# Allegro board PiMod_MOT_R0A v0.1.brd
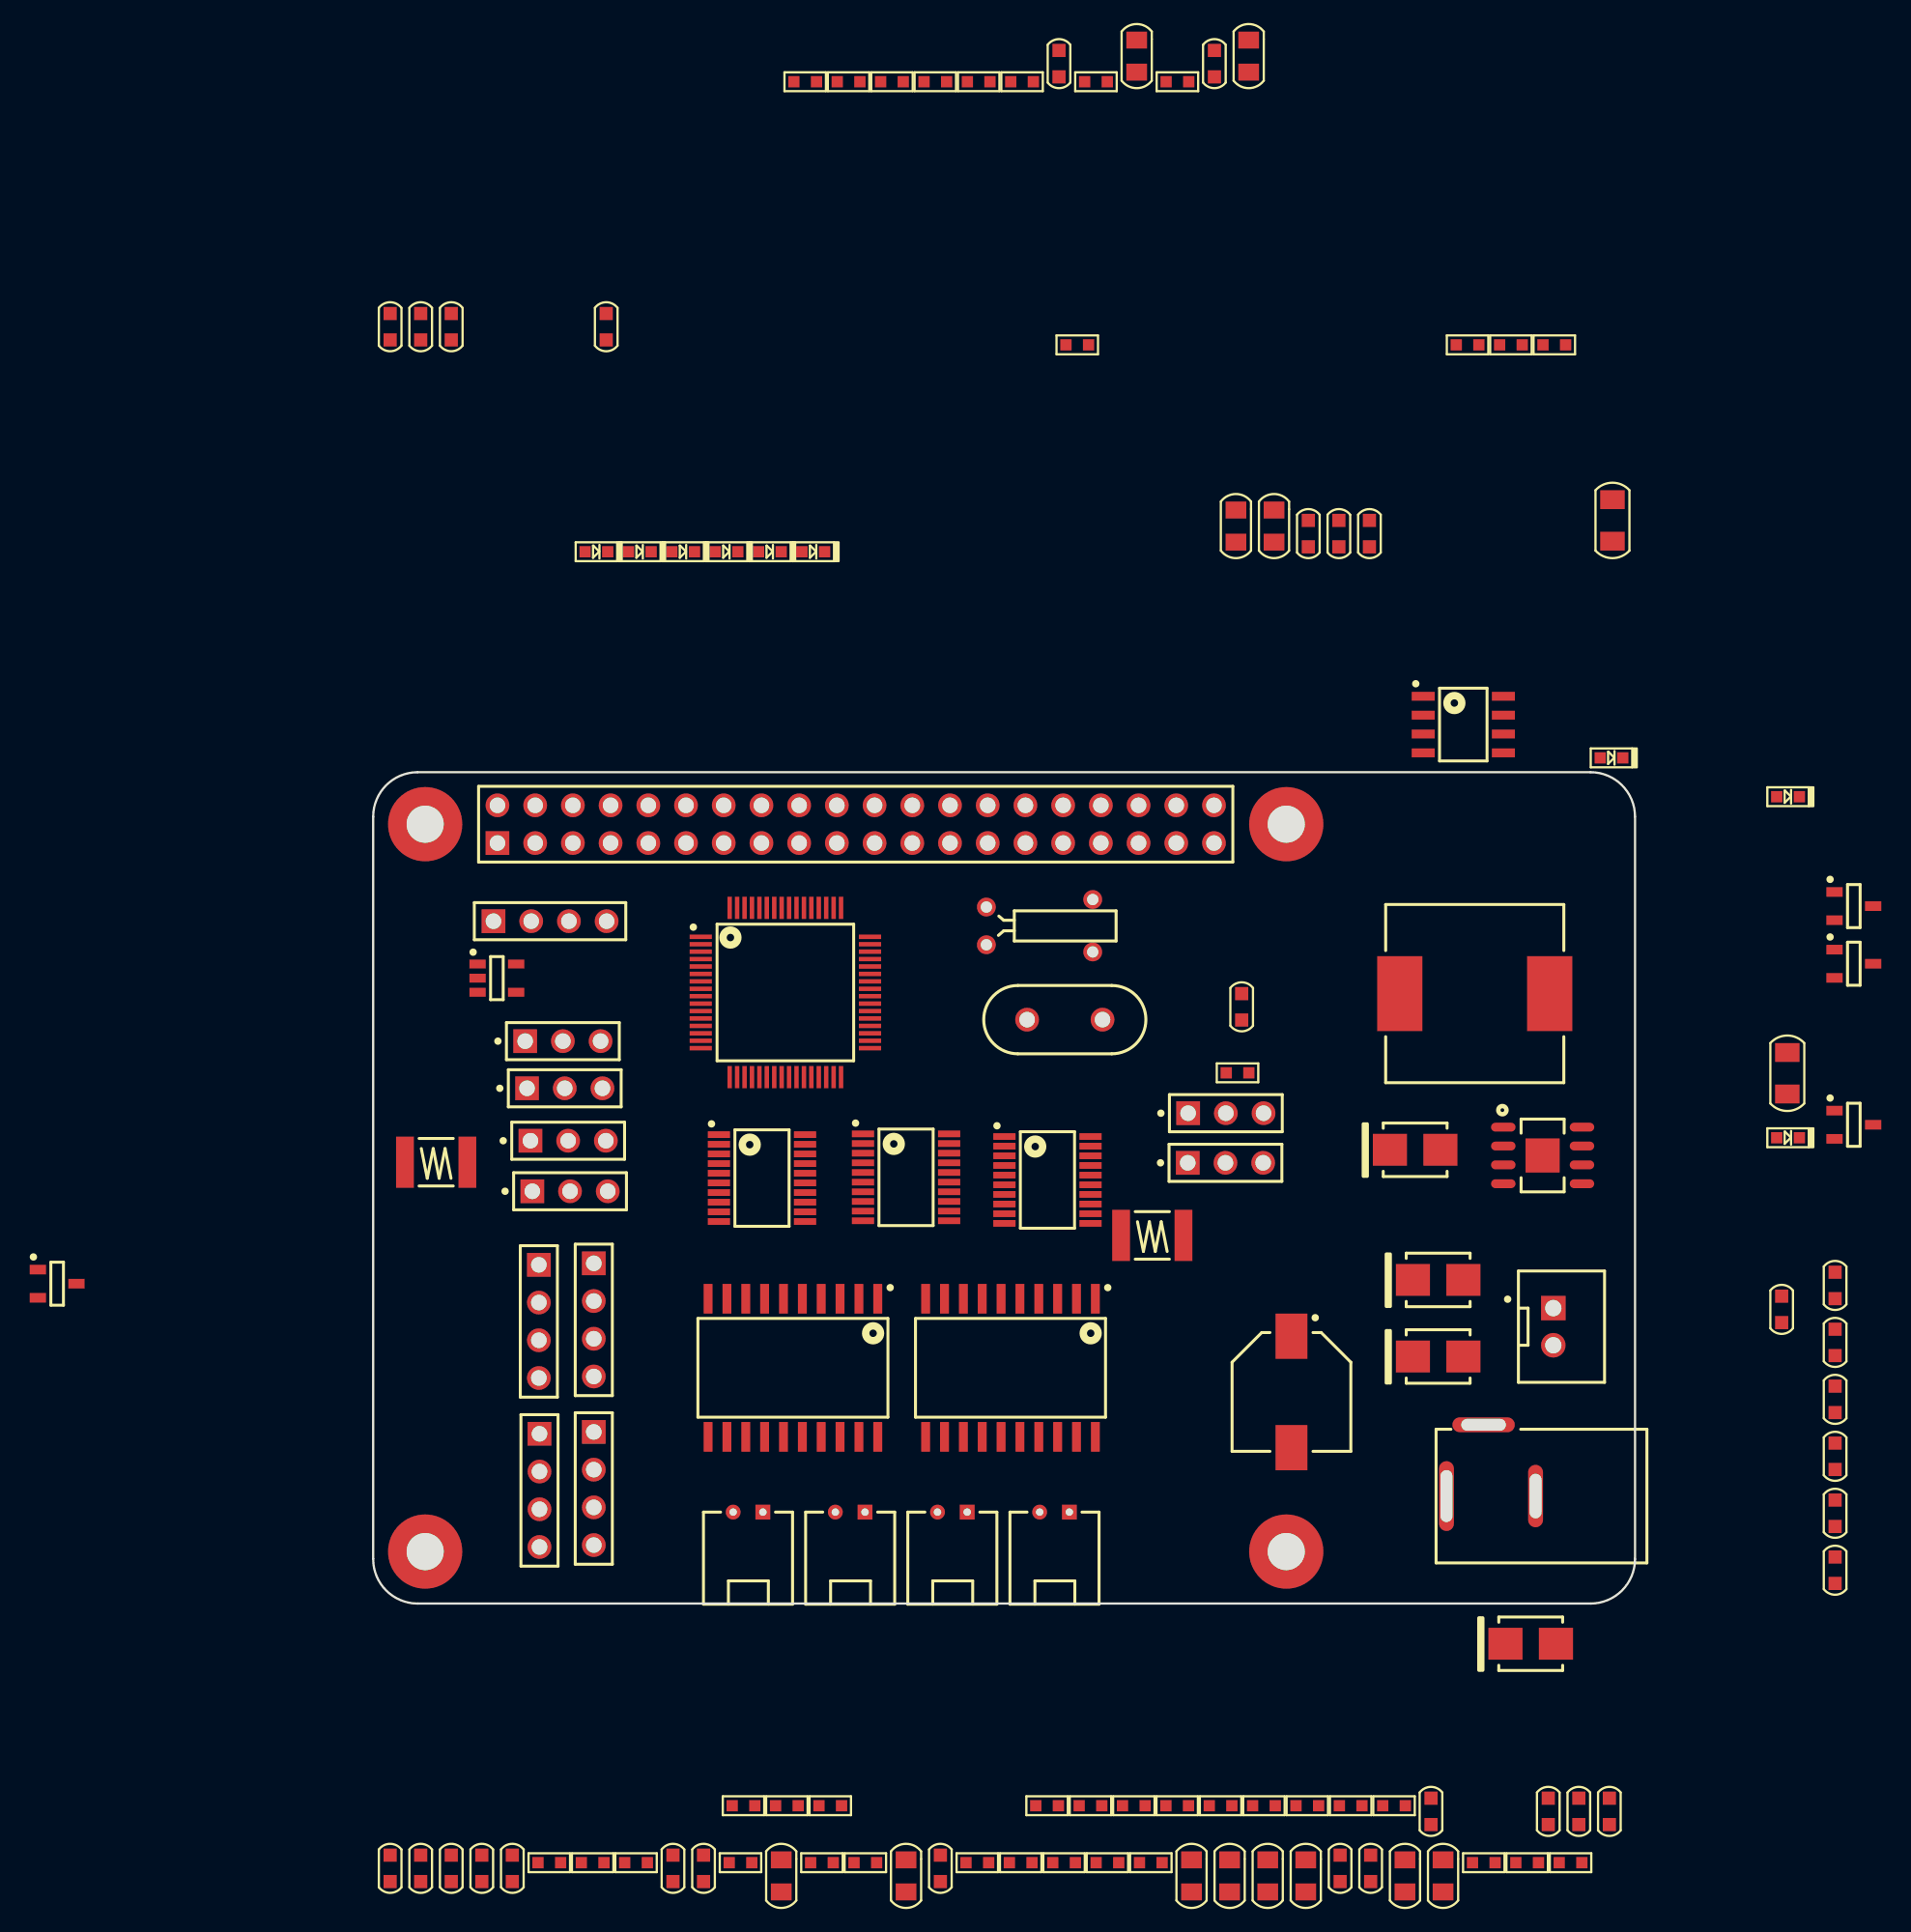
[diagram p0: board, top side]
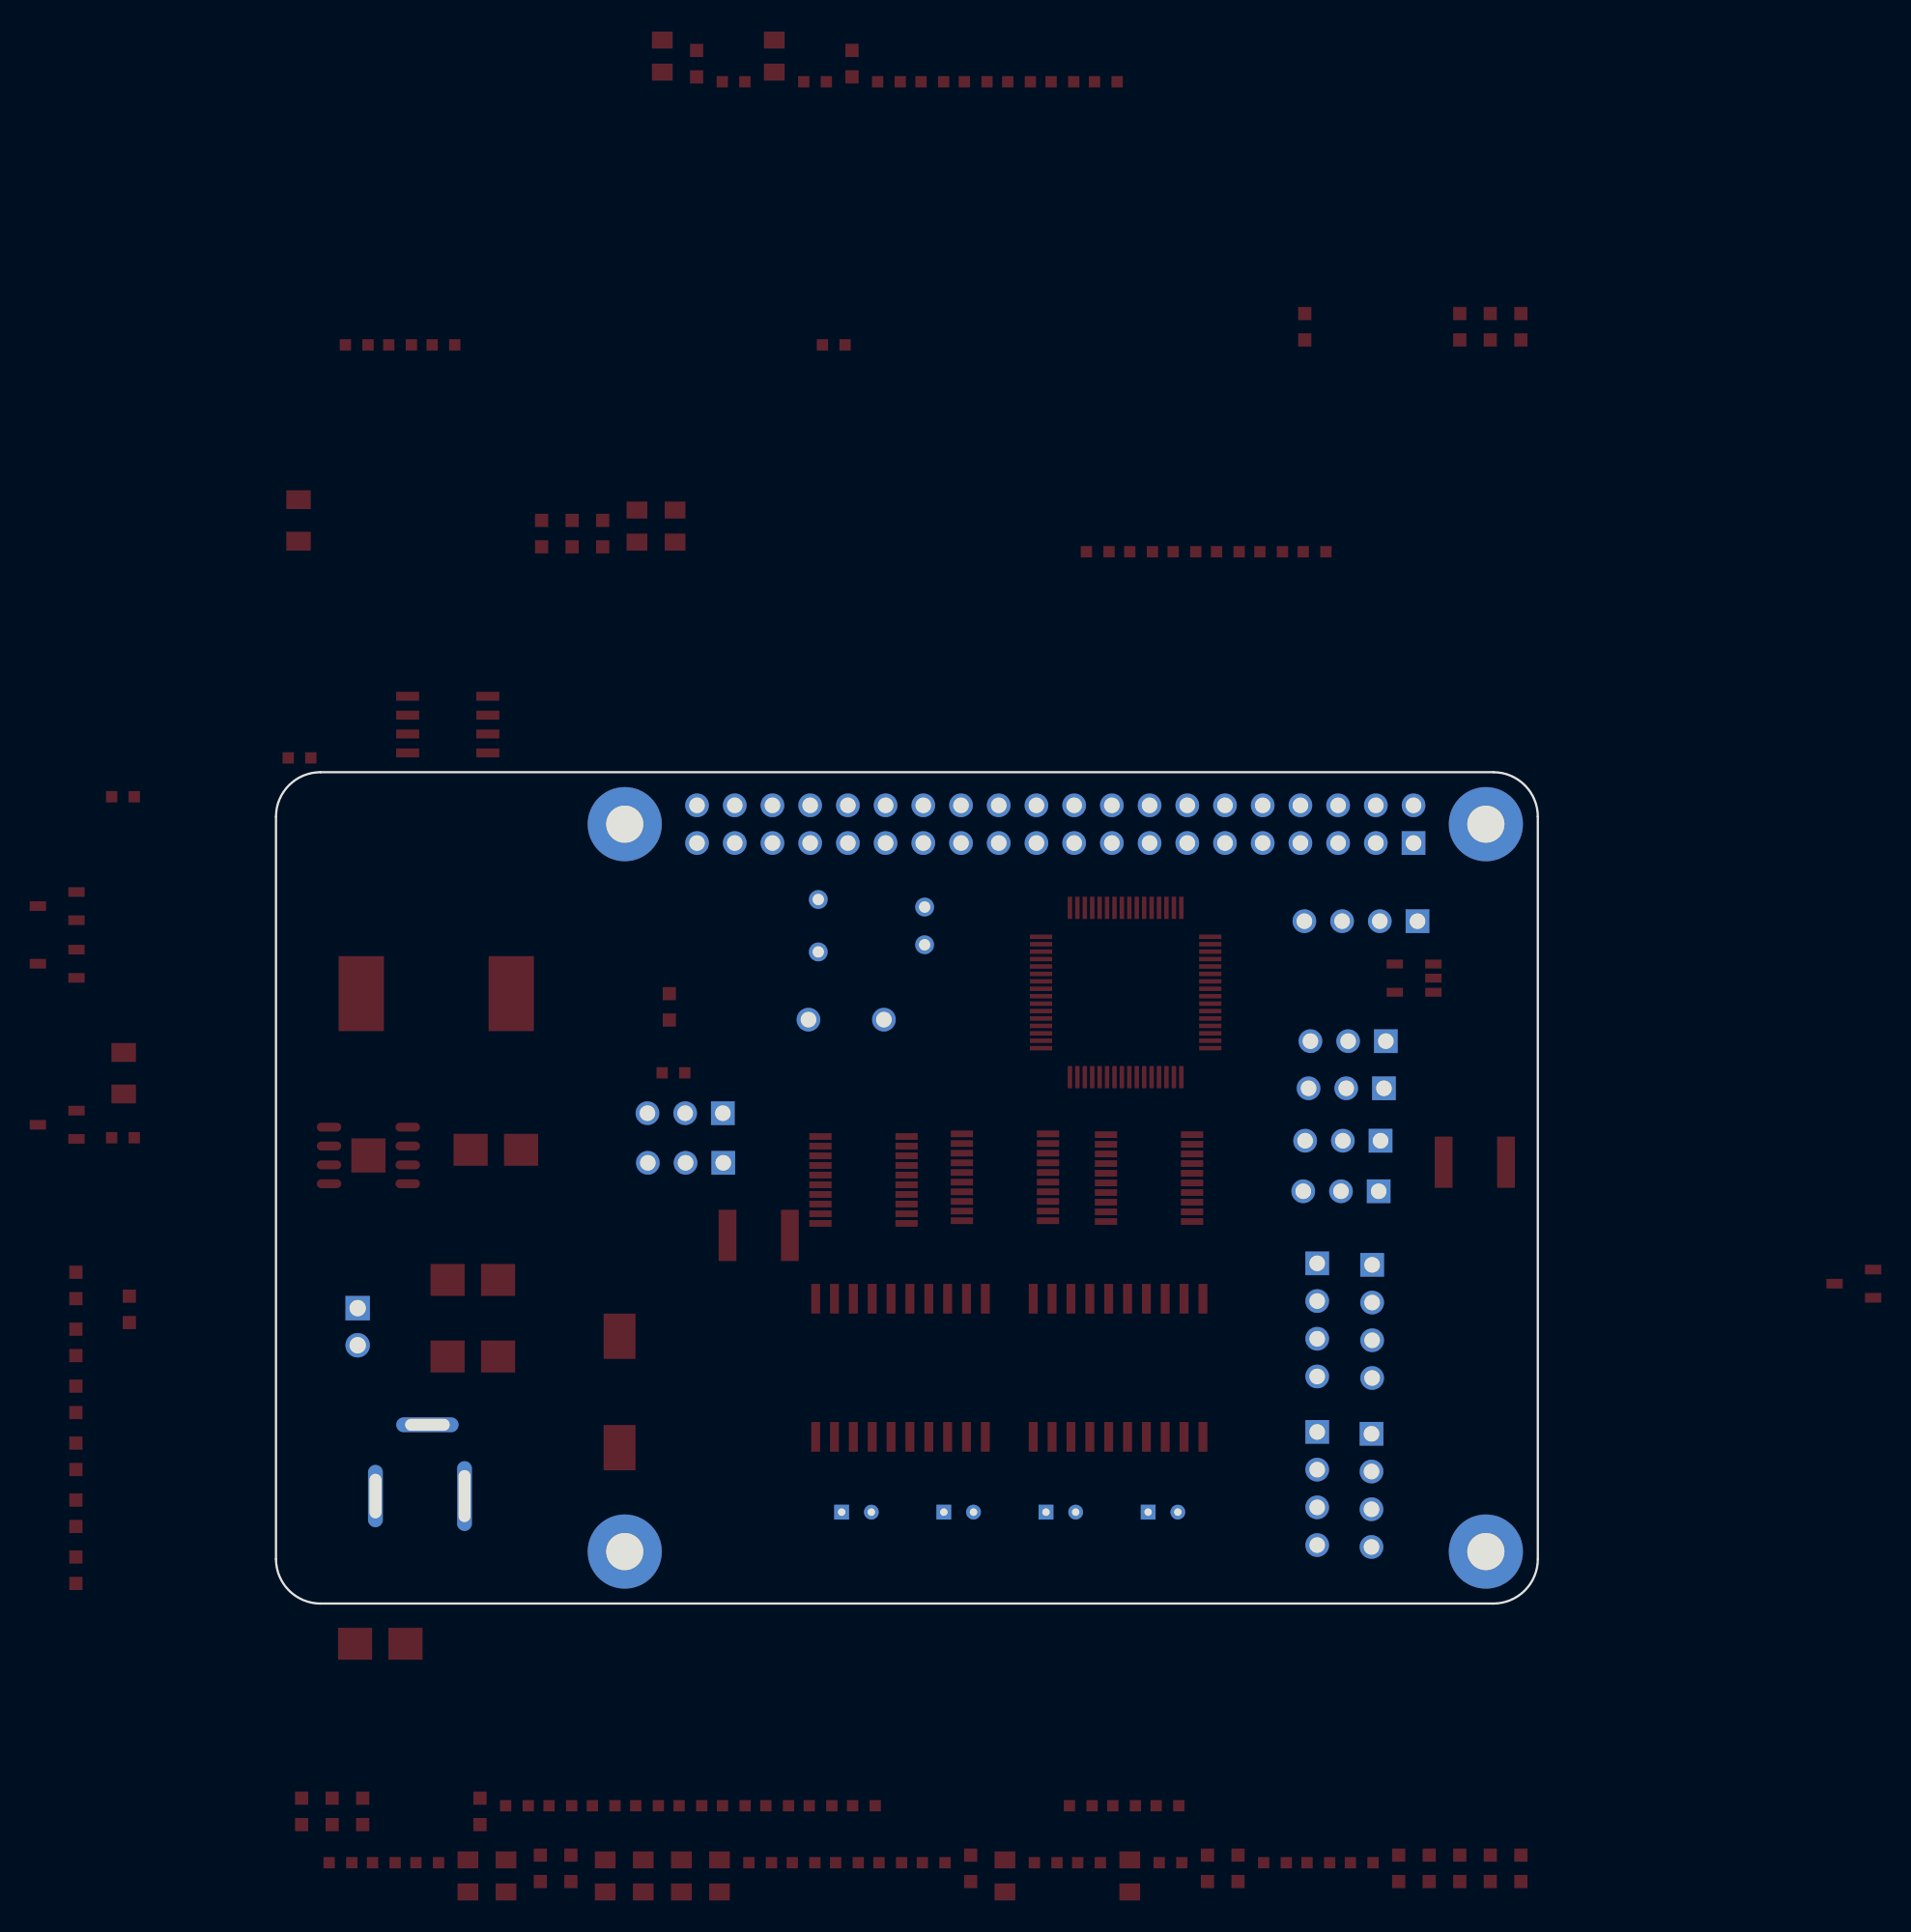
[diagram p1: board, bottom side, seen from below]

Outline 84.99 x 55.98 mm; copper layers: TOP, BOTTOM. Coordinates in mm from the lower left corner of the outline.
Outline path: 0,52.98 0,3 arc(0.88,0.88) 3,0 81.99,0 arc(84.11,0.88) 84.99,3 84.99,52.98 arc(84.11,55.1) 81.99,55.98 3,55.98 arc(0.88,55.1) 0,52.98

## Placement (name value [footprint] x y rotation side)
BT1  BATTERY  [XH2_5_2P]  79.49 19.89 270 top
C1  22pF NC  [C0603]  58.5 40.18 0 top
C2  22pF NC  [C0603]  5.26 85.98 0 top
C3  22pF  [C0603]  67.1 72.05 0 top
C4  22pF  [C0603]  65.04 72.05 0 top
C5  0.1uF  [C0603]  71.25 -14 0 top
C6  0.1uF NC  [C0603]  62.99 72.05 0 top
C7  0.1uF  [C0603]  94.86 19.81 0 top
C8  10uF  [C0805]  60.67 72.56 0 top
C9  10uF  [C0805]  58.11 72.56 0 top
C10  0.1uF  [C0603]  3.2 85.98 0 top
C11  0.1uF  [C0603]  1.14 85.98 0 top
C12  0.1uF  [C0603]  83.26 -14 0 top
C13  1.5nF  [C0603]  15.7 85.98 0 top
C14  22uF  [C1206]  95.25 35.71 0 top
C15  22uF  [C1206]  83.47 72.94 0 top
C16  0.1uF  [C0603]  81.2 -14 0 top
C17  0.1uF  [C0603]  79.15 -14 0 top
C35  330uF NC  [CAP8X8H10]  61.85 14.25 270 top
C36  10uF  [C0805]  58.97 104.2 0 top
C37  0.1uF  [C0603]  22.25 -17.83 0 top
C38  0.1uF  [C0603]  1.14 -17.83 0 top
C39  0.1uF  [C0603]  7.32 -17.83 0 top
C40  0.1uF  [C0603]  56.66 103.69 0 top
C41  0.1uF  [C0603]  46.19 103.69 0 top
C55  10uF  [C0805]  51.42 104.2 0 top
C56  0.1uF  [C0603]  38.2 -17.83 0 top
C57  0.1uF  [C0603]  20.19 -17.83 0 top
C58  0.1uF  [C0603]  5.26 -17.83 0 top
C59  0.1uF  [C0603]  3.2 -17.83 0 top
C60  10uF  [C0805]  62.81 -18.34 0 top
C61  10uF  [C0805]  60.25 -18.34 0 top
C62  0.1uF  [C0603]  98.46 6.08 0 top
C63  0.1uF  [C0603]  98.46 21.42 0 top
C64  0.1uF  [C0603]  98.46 17.59 0 top
C65  0.1uF  [C0603]  98.46 13.75 0 top
C66  10uF  [C0805]  57.68 -18.34 0 top
C67  10uF  [C0805]  69.49 -18.34 0 top
C68  0.1uF  [C0603]  65.13 -17.83 0 top
C69  10uF  [C0805]  72.06 -18.34 0 top
C70  0.1uF  [C0603]  67.18 -17.83 0 top
C71  10uF  [C0805]  55.12 -18.34 0 top
C74  0.1uF  [C0603]  98.46 2.24 0 top
C75  0.1uF  [C0603]  98.46 9.92 0 top
C76  0.1uF  [C0603]  9.37 -17.83 0 top
C77  10uF  [C0805]  27.48 -18.34 0 top
C78  10uF  [C0805]  35.89 -18.34 0 top
D1  BAT54S  [SOT23]  -21.29 21.54 0 top
D5  SS54  [DO214AA_SMB]  77.96 -2.71 0 top
D6  SS54  [DO214AA_SMB]  71.73 16.64 0 top
D7  SMBJ18CA  [DO214AA_SMB]  70.18 30.56 0 top
D8  SS54  [DO214AA_SMB]  71.73 21.79 0 top
D9  BAT54S  [SOT23]  99.73 43.08 0 top
D10  BAT54S  [SOT23]  99.73 46.97 0 top
D11  BAT54S  [SOT23]  99.73 32.24 0 top
F1  8V 2.6A  [FUSE1812]  4.24 29.72 0 top
F2  8V 2.6A  [FUSE1812]  52.48 24.79 0 top
J1  RPI CON  [SIP20X2]  8.37 51.21 0 top
J7  SWD_CON  [SIP4]  8.1 45.95 0 top
J8  MOTOR_CON  [PH2_2P_90D]  40.01 6.16 180 top
J9  MOTOR_CON  [PH2_2P_90D]  46.89 6.16 180 top
J10  MOTOR_CON  [PH2_2P_90D]  26.25 6.16 180 top
J11  MOTOR_CON  [PH2_2P_90D]  33.13 6.16 180 top
J12  SPEED_MON  [SIP4]  14.86 11.56 270 top
J13  SPEED_MON  [SIP4]  11.16 22.81 270 top
J14  ULTRA_SOUND  [SIP4]  14.86 22.91 270 top
J15  ULTRA_SOUND  [SIP4]  11.2 11.43 270 top
J16  MCU_USART2  [SIP3]  54.89 33.02 0 top
J17  MCU_USART1  [SIP3]  54.86 29.68 0 top
L1  6.8uH  [CD127]  74.19 41.07 0 top
LD1  BLUE  [LED0603]  94.53 54.33 0 top
LD2  BLUE  [LED0603]  82.64 56.95 0 top
LD3  BLUE  [LED0603]  94.53 31.37 0 top
LD4  BLUE  [LED0603]  14.27 70.83 0 top
LD5  RED  [LED0603]  17.2 70.83 0 top
LD6  RED  [LED0603]  20.12 70.83 0 top
LD7  RED  [LED0603]  23.04 70.83 0 top
LD8  RED  [LED0603]  25.96 70.83 0 top
LD9  RED  [LED0603]  28.88 70.83 0 top
P1  DC_JACK_5  [DC005]  78.29 7.24 180 top
R1  4.7K  [R0603]  57.45 35.74 0 top
R2  4.7K  [R0603]  46.66 84.76 0 top
R3  10K NC  [R0603]  27.1 -13.61 0 top
R4  10K NC  [R0603]  30.02 -13.61 0 top
R5  1K  [R0603]  47.55 -13.61 0 top
R6  1K  [R0603]  50.47 -13.61 0 top
R7  1K  [R0603]  53.39 -13.61 0 top
R8  1K  [R0603]  56.31 -13.61 0 top
R49  100K NC  [R0603]  44.63 -13.61 0 top
R50  52.3K 1%  [R0603]  59.23 -13.61 0 top
R51  30K  [R0603]  62.15 -13.61 0 top
R52  10K 1%  [R0603]  65.07 -13.61 0 top
R53  10K  [R0603]  68 -13.61 0 top
R54  4.7K  [R0603]  72.95 84.76 0 top
R55  1K  [R0603]  24.18 -13.61 0 top
R56  4.7K  [R0603]  75.87 84.76 0 top
R57  4.7K  [R0603]  78.79 84.76 0 top
R58  0R  [R0603]  11.1 -17.45 0 top
R59  0R  [R0603]  14.02 -17.45 0 top
R76  100R  [R0603]  42.85 -17.45 0 top
R77  100R  [R0603]  45.77 -17.45 0 top
R78  0R  [R0603]  16.94 -17.45 0 top
R79  0R  [R0603]  39.93 -17.45 0 top
R80  0R  [R0603]  74.04 -17.45 0 top
R81  0R  [R0603]  23.98 -17.45 0 top
R82  0R  [R0603]  53.41 102.48 0 top
R83  0R  [R0603]  29.46 -17.45 0 top
R84  10K  [R0603]  28.34 102.48 0 top
R85  90.9K  [R0603]  48.69 -17.45 0 top
R86  10K  [R0603]  31.26 102.48 0 top
R87  10K  [R0603]  34.18 102.48 0 top
R88  10K  [R0603]  37.1 102.48 0 top
R89  10K  [R0603]  40.02 102.48 0 top
R90  10K  [R0603]  42.94 102.48 0 top
R91  90.9K  [R0603]  51.61 -17.45 0 top
R92  0R  [R0603]  32.38 -17.45 0 top
R93  0R  [R0603]  79.88 -17.45 0 top
R94  0R  [R0603]  76.96 -17.45 0 top
R95  0R  [R0603]  47.92 102.48 0 top
TH1  -  [TH2_5]  3.5 3.5 0 top
TH2  -  [TH2_5]  61.5 3.5 0 top
TH3  -  [TH2_5]  3.5 52.48 0 top
TH4  -  [TH2_5]  61.5 52.48 0 top
U1  STM32F030R8  [LQFP64]  27.76 41.15 0 top
U2  AT24C02 NC  [SO8]  73.42 59.19 0 top
U12  RT8251GSP  [SO8_EP]  78.77 30.18 0 top
U13  L293DD  [SO20]  28.27 15.88 270 top
U14  L293DD  [SO20]  42.93 15.88 270 top
U15  SERVO_MOT_180D  [SIP3]  10.24 37.87 0 top
U16  SERVO_MOT_360D  [SIP3]  10.36 34.7 0 top
U17  SERVO_MOT_180D  [SIP3]  10.59 31.17 0 top
U18  SERVO_MOT_360D  [SIP3]  10.72 27.76 0 top
U19  SPX3819M5L  [SOT23-5]  8.33 42.11 0 top
U20  SN74LVC244APWR  [TSSOP20]  45.42 28.52 0 top
U21  SN74LVC244APWR  [TSSOP20]  35.89 28.7 0 top
U22  SN74LVC244APWR  [TSSOP20]  26.19 28.65 0 top
Y1  32.768KHz NC  [XTAL_32KHZ]  41.3 46.9 270 top
Y2  8MHz  [CYST]  44.04 39.32 0 top

## Library data of the parts
BT1 = BATTERY
C1-C4 C6 C36-C41 C55-C66 C71 C74-C78 = CAP NP
C5 C7-C17 C67-C70 = CAP_CE_0603
C35 = CAP
D1 D9-D11 = BAT54S
D5-D8 = DIODE
F1 F2 = FUSE
J1 = HEADER 20X2
J7 = CON_SWD
J8-J11 = CON2
J12-J15 = HEADER 4
J16 J17 = HEADER 3
L1 = INDUCTOR
LD1-LD9 = LED
P1 = DC_JACK
R1-R8 R49-R59 R76-R95 = R
TH1-TH4 = THROUGH_HOLE
U1 = STM32F030R8
U2 = AT24C512
U12 = RT8251GSP
U13 U14 = L293DD
U15-U18 = SERVO_MOT
U19 = SPX3819M5L
U20-U22 = SN74LVC244APWR
Y1 Y2 = ZTA

## Footprints (pads in the part's own frame, mm; a bottom-side part is the same pattern mirrored in y, then rotated)
C0603
  rect 0.889x0.889 smd: 1(0,0.889) 2(0,-0.889)
C0805
  rect 1.397x1.143 smd: 1(0,1.079) 2(0,-1.079)
C1206
  rect 1.651x1.27 smd: 1(0,1.397) 2(0,-1.397)
CAP8X8H10
  rect 3.05x2.15 smd: 1(-3.75,0) 2(3.75,0)
CD127
  rect 3.05x5.05 smd: 1(-5.05,0) 2(5.05,0)
CYST
  round 1.6 hole 1.05: 1(0,0) 2(5.08,0)
DC005
  oval 1x4.7 hole 0.8x3.5: 1(6,0)
  oval 1x4.2 hole 0.8x3: 2(0,0)
  oval 4.2x1 hole 3x0.8: 3(3.5,-4.8)
DO214AA_SMB
  rect 2.3x2.15 smd: 1(1.7,0) 2(-1.7,0)
FUSE1812
  rect 1.2x3.45 smd: 1(-2.1,0) 2(2.1,0)
LED0603
  rect 0.762x0.762 smd: 1(0,0) 2(1.524,0)
LQFP64
  rect 1.5x0.3 smd: 1(-5.7,3.75) 2(-5.7,3.25) 3(-5.7,2.75) 4(-5.7,2.25) 5(-5.7,1.75) 6(-5.7,1.25) 7(-5.7,0.75) 8(-5.7,0.25) 9(-5.7,-0.25) 10(-5.7,-0.75) 11(-5.7,-1.25) 12(-5.7,-1.75) 13(-5.7,-2.25) 14(-5.7,-2.75) 15(-5.7,-3.25) 16(-5.7,-3.75) 33(5.7,-3.75) 34(5.7,-3.25) 35(5.7,-2.75) 36(5.7,-2.25) 37(5.7,-1.75) 38(5.7,-1.25) 39(5.7,-0.75) 40(5.7,-0.25) 41(5.7,0.25) 42(5.7,0.75) 43(5.7,1.25) 44(5.7,1.75) 45(5.7,2.25) 46(5.7,2.75) 47(5.7,3.25) 48(5.7,3.75)
  rect 0.3x1.5 smd: 17(-3.75,-5.7) 18(-3.25,-5.7) 19(-2.75,-5.7) 20(-2.25,-5.7) 21(-1.75,-5.7) 22(-1.25,-5.7) 23(-0.75,-5.7) 24(-0.25,-5.7) 25(0.25,-5.7) 26(0.75,-5.7) 27(1.25,-5.7) 28(1.75,-5.7) 29(2.25,-5.7) 30(2.75,-5.7) 31(3.25,-5.7) 32(3.75,-5.7) 49(3.75,5.7) 50(3.25,5.7) 51(2.75,5.7) 52(2.25,5.7) 53(1.75,5.7) 54(1.25,5.7) 55(0.75,5.7) 56(0.25,5.7) 57(-0.25,5.7) 58(-0.75,5.7) 59(-1.25,5.7) 60(-1.75,5.7) 61(-2.25,5.7) 62(-2.75,5.7) 63(-3.25,5.7) 64(-3.75,5.7)
PH2_2P_90D
  rect 1x1 hole 0.5: 1(0,0)
  round 1 hole 0.5: 2(2,0)
R0603
  rect 0.762x0.762 smd: 1(0,0) 2(1.524,0)
SIP3
  rect 1.6x1.6 hole 1.05: 1(0,0)
  round 1.6 hole 1.05: 2(2.54,0) 3(5.08,0)
SIP4
  rect 1.6x1.6 hole 1.05: 1(0,0)
  round 1.6 hole 1.05: 2(2.54,0) 3(5.08,0) 4(7.62,0)
SIP20X2
  rect 1.6x1.6 hole 1.05: 1(0,0)
  round 1.6 hole 1.05: 2(0,2.54) 3(2.54,0) 4(2.54,2.54) 5(5.08,0) 6(5.08,2.54) 7(7.62,0) 8(7.62,2.54) 9(10.16,0) 10(10.16,2.54) 11(12.7,0) 12(12.7,2.54) 13(15.24,0) 14(15.24,2.54) 15(17.78,0) 16(17.78,2.54) 17(20.32,0) 18(20.32,2.54) 19(22.86,0) 20(22.86,2.54) 21(25.4,0) 22(25.4,2.54) 23(27.94,0) 24(27.94,2.54) 25(30.48,0) 26(30.48,2.54) 27(33.02,0) 28(33.02,2.54) 29(35.56,0) 30(35.56,2.54) 31(38.1,0) 32(38.1,2.54) 33(40.64,0) 34(40.64,2.54) 35(43.18,0) 36(43.18,2.54) 37(45.72,0) 38(45.72,2.54) 39(48.26,0) 40(48.26,2.54)
SO8
  rect 1.55x0.6 smd: 1(-2.7,1.905) 2(-2.7,0.635) 3(-2.7,-0.635) 4(-2.7,-1.905) 5(2.7,-1.905) 6(2.7,-0.635) 7(2.7,0.635) 8(2.7,1.905)
SO8_EP
  oval 1.65x0.6 smd: 1(-2.65,1.905) 2(-2.65,0.635) 3(-2.65,-0.635) 4(-2.65,-1.905) 5(2.65,-1.905) 6(2.65,-0.635) 7(2.65,0.635) 8(2.65,1.905)
  rect 2.3x2.3 smd: 9(0,0)
SO20
  rect 2x0.6 smd: 1(-4.65,5.715) 2(-4.65,4.445) 3(-4.65,3.175) 4(-4.65,1.905) 5(-4.65,0.635) 6(-4.65,-0.635) 7(-4.65,-1.905) 8(-4.65,-3.175) 9(-4.65,-4.445) 10(-4.65,-5.715) 11(4.65,-5.715) 12(4.65,-4.445) 13(4.65,-3.175) 14(4.65,-1.905) 15(4.65,-0.635) 16(4.65,0.635) 17(4.65,1.905) 18(4.65,3.175) 19(4.65,4.445) 20(4.65,5.715)
SOT23
  rect 1.1x0.65 smd: 1(-1.3,0.95) 2(-1.3,-0.95) 3(1.3,0)
SOT23-5
  rect 1.1x0.6 smd: 1(-1.3,0.95) 2(-1.3,0) 3(-1.3,-0.95) 4(1.3,-0.95) 5(1.3,0.95)
TH2_5
  round 5 hole 2.5: 1(0,0)
TSSOP20
  rect 1.5x0.45 smd: 1(-2.9,2.925) 2(-2.9,2.275) 3(-2.9,1.625) 4(-2.9,0.975) 5(-2.9,0.325) 6(-2.9,-0.325) 7(-2.9,-0.975) 8(-2.9,-1.625) 9(-2.9,-2.275) 10(-2.9,-2.925) 11(2.9,-2.925) 12(2.9,-2.275) 13(2.9,-1.625) 14(2.9,-0.975) 15(2.9,-0.325) 16(2.9,0.325) 17(2.9,0.975) 18(2.9,1.625) 19(2.9,2.275) 20(2.9,2.925)
XH2_5_2P
  rect 1.65x1.65 hole 1.1: 1(0,0)
  round 1.65 hole 1.1: 2(2.5,0)
XTAL_32KHZ
  round 1.27 hole 0.762: (-0.508,7.163) (3.023,7.163) 1(0,0) 2(2.54,0)

## Nets
GND: BT1.2(-) C1.2 C2.2 C3.2 C4.2 C5.2 C6.2 C8.2 C9.2 C10.2 C11.2 C12.1 C14.2 C15.2 C16.2 C17.2 C35.2 C36.2 C37.2 C38.2 C39.2 C40.2 C41.2 C55.2 C56.2 C57.2 C58.2 C59.2 C60.2 C61.2 C62.2 C63.2 C64.2 C65.2 C66.2 C67.2 C68.2 C69.2 C70.2 C71.2 C74.2 C75.2 C76.2 C77.2 C78.2 D1.1 D5.1(A) D7.1(A) D9.1 D10.1 D11.1 J1.6 J1.9 J1.14 J1.20 J1.25 J1.30 J1.34 J1.39 J7.4(GND) J12.4 J13.4 J14.4 J15.4 J16.3 J17.3 LD5.2(CATHODE) LD6.2(CATHODE) LD7.2(CATHODE) LD8.2(CATHODE) LD9.2(CATHODE) P1.2(GND1) P1.3(GND2) R2.2 R4.2 R51.1 R52.1 R85.1 R87.1 R89.1 R91.1 U1.12(VSSA) U1.31(VSS#31) U1.63(VSS#63) U2.1(A0) U2.2(A1) U2.4(GND) U12.4(GND1) U12.9(GND2) U13.4(GND#4) U13.5(GND#5) U13.6(GND#6) U13.7(GND#7) U13.14(GND#14) U13.15(GND#15) U13.16(GND#16) U13.17(GND#17) U14.4(GND#4) U14.5(GND#5) U14.6(GND#6) U14.7(GND#7) U14.14(GND#14) U14.15(GND#15) U14.16(GND#16) U14.17(GND#17) U15.3(GND) U16.3(GND) U17.3(GND) U18.3(GND) U19.2(GND) U20.1(1\O\E\) U20.10(GND) U20.19(2\O\E\) U21.1(1\O\E\) U21.10(GND) U21.19(2\O\E\) U22.1(1\O\E\) U22.10(GND) U22.19(2\O\E\)
VBAT: BT1.1(+) D8.1(A) R90.2
VDD3V3: C6.1 C36.1 C37.1 C38.1 C39.1 C40.1 C41.1 C68.1 C69.1 C71.1 C74.1 C75.1 C76.1 C77.1 C78.1 D1.2 D9.2 D10.2 D11.2 J7.1(VCC) R1.1 R3.1 R5.2 R6.2 R7.2 R8.2 R55.2 R88.2 U1.1(VBAT/VLCD) U1.13(VDDA) U1.32(VDD#32) U1.64(VDD#64) U2.8(VCC) U19.5(VO) U20.20(VCC) U21.20(VCC) U22.20(VCC)
VDD5V: C14.1 C15.1 C16.1 C17.1 C67.1 F1.1 F2.1 J1.2 J1.4 J12.3 J13.3 J14.1 J15.1 L1.2 R50.2 R54.2 R86.2 U19.1(VIN) U19.3(EN)
VDD12V: C8.1 C9.1 C10.1 C11.1 C35.1 D6.2(K) D7.2(K) D8.2(K) R49.1 R53.2 R84.2 U12.2(VIN)
BOOT0: R1.2 R2.1 U1.60(BOOT0)
FB_5V: R50.1 R52.2 U12.5(FB)
GPIO2: J1.3 R79.1
GPIO3: J1.5 R78.1
GPIO4: J1.7
GPIO5: J1.29
GPIO6: J1.31
GPIO7: J1.26
GPIO8: J1.24
GPIO9: J1.21 R80.1 R82.1
GPIO10: J1.19 R83.1
GPIO11: J1.23 R81.1
GPIO12: J1.32
GPIO13: J1.33
GPIO14: J1.8 R59.1
GPIO15: J1.10 R58.1
GPIO16: J1.36
GPIO17: J1.11
GPIO18: J1.12
GPIO19: J1.35
GPIO20: J1.38
GPIO21: J1.40
GPIO22: J1.15 LD3.2(CATHODE)
GPIO23: J1.16 LD2.2(CATHODE)
GPIO24: J1.18 LD4.2(CATHODE)
GPIO25: J1.22
GPIO26: J1.37
GPIO27: J1.13 LD1.2(CATHODE)
ID_SC: J1.28 U2.6(SCL)
ID_SD: J1.27 U2.5(SDA)
ID_WP: R3.2 R4.1 U2.7(WP)
MCU_RST#: C5.1 U1.7(NRST)
MOT1EN: U14.1(EN1) U20.14(1Y3)
MOT1IN1: U14.2(IN1) U20.18(1Y1)
MOT1IN2: U14.9(IN2) U20.16(1Y2)
MOT1O1: J8.1 U14.3(OUT1)
MOT1O2: J8.2 U14.8(OUT2)
MOT1SPD: J12.1 U22.2(1A1)
MOT2EN: U14.11(EN2) U20.7(2Y2)
MOT2IN1: U14.12(IN3) U20.12(1Y4)
MOT2IN2: U14.19(IN4) U20.9(2Y1)
MOT2O1: J9.1 U14.13(OUT3)
MOT2O2: J9.2 U14.18(OUT4)
MOT2SPD: J12.2 U22.4(1A2)
MOT3EN: U13.1(EN1) U21.18(1Y1)
MOT3IN1: U13.2(IN1) U20.5(2Y3)
MOT3IN2: U13.9(IN2) U20.3(2Y4)
MOT3O1: J10.1 U13.3(OUT1)
MOT3O2: J10.2 U13.8(OUT2)
MOT3SPD: J13.1 U22.6(1A3)
MOT4EN: U13.11(EN2) U21.12(1Y4)
MOT4IN1: U13.12(IN3) U21.16(1Y2)
MOT4IN2: U13.19(IN4) U21.14(1Y3)
MOT4O1: J11.1 U13.13(OUT3)
MOT4O2: J11.2 U13.18(OUT4)
MOT4SPD: J13.2 U22.8(1A4)
PA0: U1.14(PA0)
PA1: U1.15(PA1)
PA2: J16.1 U1.16(PA2)
PA3: J16.2 U1.17(PA3)
PA4: R80.2 U1.20(PA4)
PA5: R81.2 U1.21(PA5)
PA6: R82.2 U1.22(PA6)
PA7: R83.2 U1.23(PA7)
PA8: U1.41(PA8)
PA9: J17.1 R58.2 U1.42(PA9)
PA10: J17.2 R59.2 U1.43(PA10)
PA11: U1.44(PA11)
PA12: U1.45(PA12) U22.11(2A1)
PA13: R77.1 U1.46(PA13) U22.5(2Y3)
PA14: R76.1 U1.49(PA14) U22.13(2A2)
PA15: U1.50(PA15) U22.3(2Y4)
PB0: U1.26(PB0) U21.2(1A1)
PB1: U1.27(PB1) U21.8(1A4)
PB2: U1.28(PB2) U22.18(1Y1)
PB3: U1.55(PB3) U22.16(1Y2)
PB4: U1.56(PB4) U20.6(1A3)
PB5: U1.57(PB5) U20.13(2A2)
PB6: U1.58(PB6) U22.14(1Y3)
PB7: U1.59(PB7) U22.12(1Y4)
PB8: U1.61(PB8) U21.15(2A3)
PB9: U1.62(PB9) U21.17(2A4)
PB10: R78.2 U1.29(PB10)
PB11: R79.2 U1.30(PB11)
PB12: U1.33(PB12)
PB13: U1.34(PB13)
PB14: U1.35(PB14) U21.11(2A1)
PB15: U1.36(PB15) U21.13(2A2)
PC0: D1.3 R92.1 U1.8(PC0)
PC1: D9.3 R93.1 U1.9(PC1)
PC2: D10.3 R94.1 U1.10(PC2)
PC3: D11.3 R95.1 U1.11(PC3)
PC4: U1.24(PC4)
PC5: U1.25(PC5)
PC6: U1.37(PC6) U20.2(1A1)
PC7: U1.38(PC7) U20.4(1A2)
PC8: U1.39(PC8) U20.8(1A4)
PC9: U1.40(PC9) U20.11(2A1)
PC10: U1.51(PC10) U20.15(2A3)
PC11: U1.52(PC11) U20.17(2A4)
PC12: U1.53(PC12) U21.4(1A2)
PC13: U1.2(PC13) U21.6(1A3)
PC14: C1.1 U1.3(PC14/OSC32_IN) Y1.1
PC15: C2.1 U1.4(PC15/OSC32_OUT) Y1.2
PD2: U1.54(PD2)
PF0: C3.1 U1.5(PF0/OSC_IN) Y2.1
PF1: C4.1 U1.6(PF1/OSC_OUT) Y2.2
PF4: U1.18(PF4)
PF5: U1.19(PF5)
PF6: U1.47(PF6)
PF7: U1.48(PF7)
SERVO1: U18.1(CTL) U21.9(2Y1)
SERVO2: U16.1(CTL) U21.7(2Y2)
SERVO3: U15.1(CTL) U21.5(2Y3)
SERVO4: U17.1(CTL) U21.3(2Y4)
SW_5V: C7.1 D5.2(K) L1.1 U12.3(SW)
SWCLK: J7.2(CLK) R76.2
SWDIO: J7.3(DAT) R77.2
US1_ECHO: J14.3 U22.15(2A3)
US1_TRIG: J14.2 U22.9(2Y1)
US2_ECHO: J15.3 U22.17(2A4)
US2_TRIG: J15.2 U22.7(2Y2)
VEXT: D6.1(A) P1.1(VCC)
VMON_3V3: R88.1 R89.2 R95.2
VMON_5V: R86.1 R87.2 R94.2
VMON_12V: R84.1 R85.2 R93.2
VMON_BAT: R90.1 R91.2 R92.2
VMOT: C55.1 C56.1 C57.1 C58.1 C59.1 C60.1 F1.2 R56.2 U13.10(VCC) U13.20(VCCIO) U14.10(VCC) U14.20(VCCIO)
VSRV: C61.1 C62.1 C63.1 C64.1 C65.1 C66.1 F2.2 R57.2 U15.2(VCC) U16.2(VCC) U17.2(VCC) U18.2(VCC)
N1524440: C12.2 U12.8(SS)
N1524472: C7.2 U12.1(BOOT)
N1524524: C13.2 U12.6(COMP)
N1524544: C13.1 R51.2
N1534047: LD1.1(ANODE) R5.1
N1534057: LD2.1(ANODE) R6.1
N1534067: LD3.1(ANODE) R7.1
N1534077: LD4.1(ANODE) R8.1
N1534958: R49.2 U12.7(EN)
N1536928: LD7.1(ANODE) R55.1
N1537106: LD6.1(ANODE) R54.1
N1537194: LD5.1(ANODE) R53.1
N1538971: LD8.1(ANODE) R56.1
N1539104: LD9.1(ANODE) R57.1
N1580615: C70.1 U19.4(BP)

Pads without a net: J1 1 17; TH1 1; TH2 1; TH3 1; TH4 1; U2 3
